# Altium PCB PCB1.PcbDoc
Units mil, origin at the board's own origin, x right, y up, seen from the top; angles counter-clockwise.
Board outline 2810 x 3790 mil, 2 copper layers (Top Layer, Bottom Layer); 3 components, 148 nets, 236 pads, 0 vias.
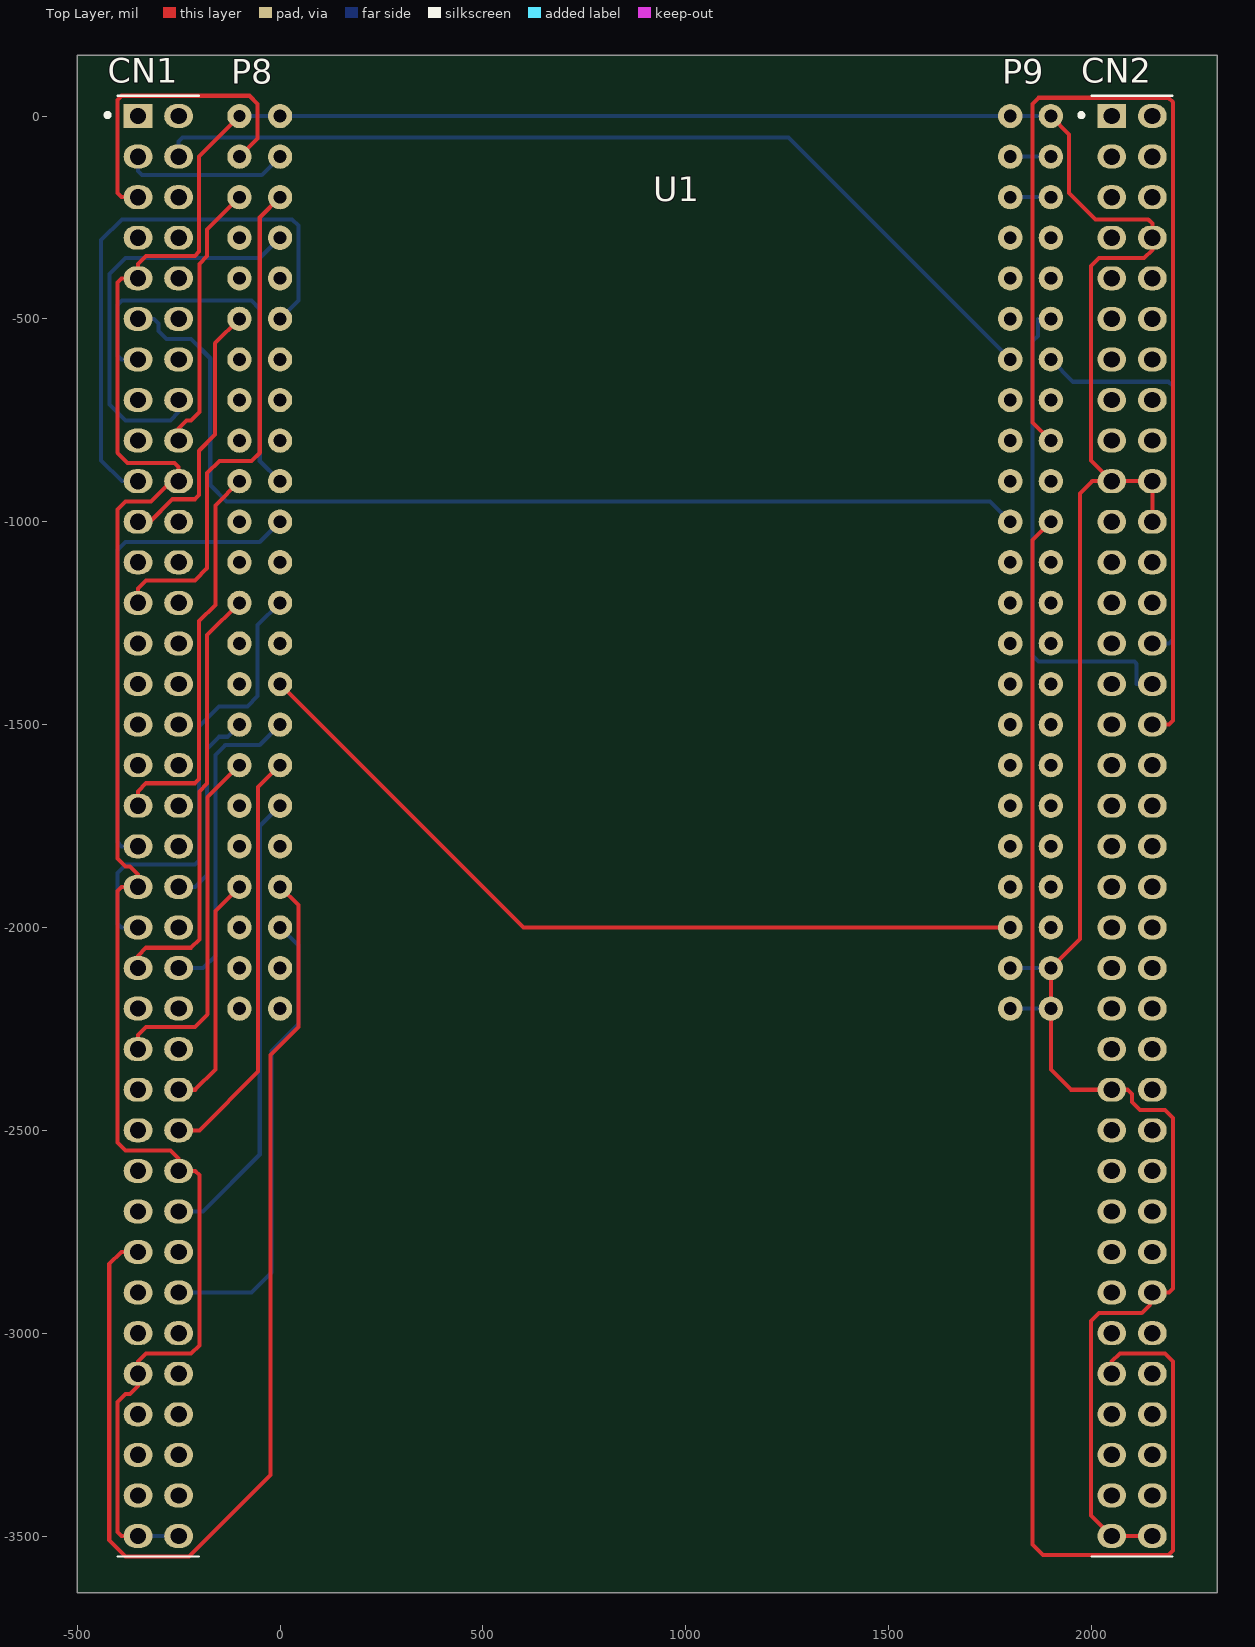
[diagram p0: Top Layer view]
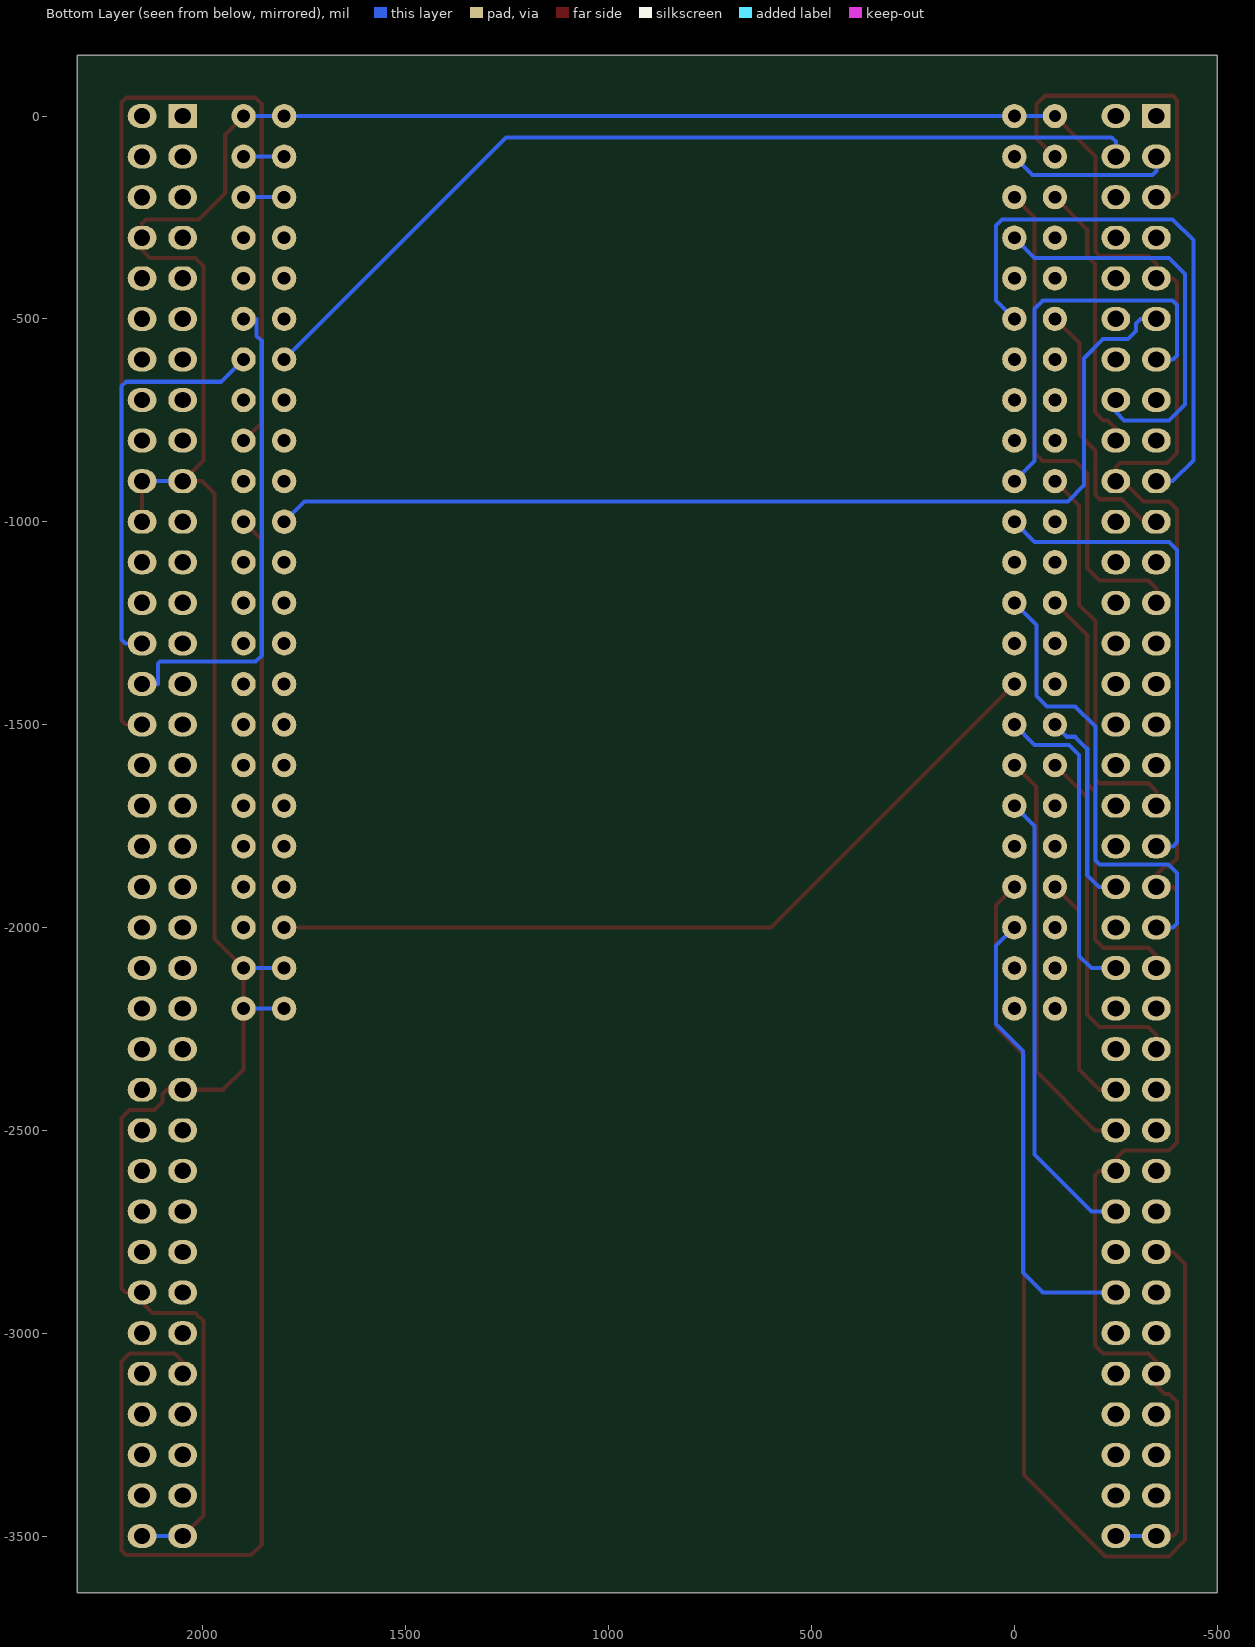
[diagram p1: Bottom Layer view, seen from below]

## Layer stack, top to bottom
Top Solder: solder mask 0.4, Solder Resist, Dk 3.5
Top Layer: signal copper 1.4
Dielectric 1: dielectric 12.6, FR-4, Dk 4.8
Bottom Layer: signal copper 1.4
Bottom Solder: solder mask 0.4, Solder Resist, Dk 3.5

## Board outline
-500,-3640 2310,-3640 2310,150 -500,150

## Design rules (kind name [scope] priority, off if disabled: settings)
Clearance [All] p1: gap=10 ignorepadtopadclearanceinfootprint=FALSE except(0: Arc-Hole Track-Hole SMDPad-Hole THPad-Hole Via-Hole Fill-Hole Poly-Hole Region-Hole Text-Hole)
PolygonConnect [All] p1: connectstyle=Relief reliefconductorwidth=10 reliefentries=4 polygonreliefangle="90 Angle" airgapwidth=10
RoutingVias [All] p1: holewidth=28 width=50 viastyle="Through Hole" minholewidth=28 minwidth=50 maxholewidth=28 maxwidth=50
SolderMaskExpansion [All] p1: expansion=4
Width [All] p1: maxlimit=10 minlimit=10 preferedwidth=10
30 further rules are at their usual default settings.

## Components (designator, comment, footprint, x,y, rotation, side; value= is the part's Value field where it differs from the comment)
CN1 "Header 36X2" HDR_2x36_2R54_V_M -350,0 r270 top
CN2 "Header 36X2" HDR_2x36_2R54_V_M 2050,0 r270 top
U1 "BBB Header x 2" "Beaglebone Black Thru" 900,-1100 r0 top

## Footprints (in the part's own frame and the unit in brackets; to place one, negate y for a bottom-side part, rotate by r counter-clockwise, add the part's x,y. Pads: shape width x height; smd on the part's side, far side on the other; paste and mask are expansions set on the pad)
"Beaglebone Black Thru" [mil]
  round 60 hole 31.5: 8-1(-900,1100) 8-3(-900,1000) 8-4(-1000,1000) 8-5(-900,900) 8-6(-1000,900) 8-7(-900,800) 8-8(-1000,800) 8-9(-900,700) 8-10(-1000,700) 8-11(-900,600) 8-12(-1000,600) 8-13(-900,500) 8-14(-1000,500) 8-15(-900,400) 8-16(-1000,400) 8-17(-900,300) 8-18(-1000,300) 8-19(-900,200) 8-20(-1000,200) 8-21(-900,100) 8-22(-1000,100) 8-23(-900,0) 8-24(-1000,0) 8-25(-900,-100) 8-26(-1000,-100) 8-27(-900,-200) 8-28(-1000,-200) 8-29(-900,-300) 8-30(-1000,-300) 8-31(-900,-400) 8-32(-1000,-400) 8-33(-900,-500) 8-34(-1000,-500) 8-35(-900,-600) 8-36(-1000,-600) 8-37(-900,-700) 8-38(-1000,-700) 8-39(-900,-800) 8-40(-1000,-800) 8-41(-900,-900) 8-42(-1000,-900) 8-43(-900,-1000) 8-44(-1000,-1000) 8-45(-900,-1100) 8-46(-1000,-1100) 9-1(1000,1100) 9-2(900,1100) 9-3(1000,1000) 9-4(900,1000) 9-5(1000,900) 9-6(900,900) 9-7(1000,800) 9-8(900,800) 9-9(1000,700) 9-10(900,700) 9-11(1000,600) 9-12(900,600) 9-13(1000,500) 9-14(900,500) 9-15(1000,400) 9-16(900,400) 9-17(1000,300) 9-18(900,300) 9-19(1000,200) 9-20(900,200) 9-21(1000,100) 9-22(900,100) 9-23(1000,0) 9-24(900,0) 9-25(1000,-100) 9-26(900,-100) 9-27(1000,-200) 9-28(900,-200) 9-29(1000,-300) 9-30(900,-300) 9-31(1000,-400) 9-32(900,-400) 9-33(1000,-500) 9-34(900,-500) 9-35(1000,-600) 9-36(900,-600) 9-37(1000,-700) 9-38(900,-700) 9-39(1000,-800) 9-40(900,-800) 9-41(1000,-900) 9-42(900,-900) 9-43(1000,-1000) 9-44(900,-1000) 9-45(1000,-1100) 9-46(900,-1100)
  round 60 hole 30 paste+0: 8-2(-1000,1100)
  body extent -1048,-1163 1048,1160, height 315
HDR_2x36_2R54_V_M [mm] "Male Header, Pitch 2.54mm, 36x2 Position, Mated Height 6mm, Tail Length 3mm"
  rect 1.5x1.8 hole 1.02: 1(0,0)
  oval 1.5x1.8 hole 1.02: 2(0,2.54) 3(2.54,0) 4(2.54,2.54) 5(5.08,0) 6(5.08,2.54) 7(7.62,0) 8(7.62,2.54) 9(10.16,0) 10(10.16,2.54) 11(12.7,0) 12(12.7,2.54) 13(15.24,0) 14(15.24,2.54) 15(17.78,0) 16(17.78,2.54) 17(20.32,0) 18(20.32,2.54) 19(22.86,0) 20(22.86,2.54) 21(25.4,0) 22(25.4,2.54) 23(27.94,0) 24(27.94,2.54) 25(30.48,0) 26(30.48,2.54) 27(33.02,0) 28(33.02,2.54) 29(35.56,0) 30(35.56,2.54) 31(38.1,0) 32(38.1,2.54) 33(40.64,0) 34(40.64,2.54) 35(43.18,0) 36(43.18,2.54) 37(45.72,0) 38(45.72,2.54) 39(48.26,0) 40(48.26,2.54) 41(50.8,0) 42(50.8,2.54) 43(53.34,0) 44(53.34,2.54) 45(55.88,0) 46(55.88,2.54) 47(58.42,0) 48(58.42,2.54) 49(60.96,0) 50(60.96,2.54) 51(63.5,0) 52(63.5,2.54) 53(66.04,0) 54(66.04,2.54) 55(68.58,0) 56(68.58,2.54) 57(71.12,0) 58(71.12,2.54) 59(73.66,0) 60(73.66,2.54) 61(76.2,0) 62(76.2,2.54) 63(78.74,0) 64(78.74,2.54) 65(81.28,0) 66(81.28,2.54) 67(83.82,0) 68(83.82,2.54) 69(86.36,0) 70(86.36,2.54) 71(88.9,0) 72(88.9,2.54)
  silkscreen extent -1.27,-2.03 90.17,3.81, body extent -1.27,-1.27 90.17,3.81, height 9

## Part data
CN1 CN2: "Header, 36-Pin, Dual row", Publisher="Altium Limited", Revision="17-Jul-2002: Re-released for DXP Platform."
U1: library part Beaglebone_Black, "Beaglebone Black Header", Current Rating="5.7A per Contact", Insulation Color=Black, Manufacturer="Samtec Inc.", Manufacturer Part Number=SSW-123-03-G-D, Material Flammability Rating="UL94 V-0", Operating Temperature="-55°C ~ 125°C", Supplier Part Number 1=SSW-123-03-G-D-ND, Voltage Rating=-, Applications=-, Category="Connectors, Interconnects", Connector Type=Receptacle, Contact Finish - Mating=Gold, Contact Finish - Post=Gold, Contact Finish Thickness - Mating="20.0µin (0.51µm)", Contact Finish Thickness - Post="3.00µin (0.076µm)", Contact Length - Post="0.394\" (10.00mm)", Contact Material="Phosphor Bronze", Contact Shape=Square, Contact Type=Forked, Fastening Type=Push-Pull, Features=-, Ingress Protection=-, Insulation Height="0.335\" (8.51mm)", Insulation Material="Liquid Crystal Polymer (LCP)", Mated Stacking Heights=-, Mounting Type="Through Hole", Number of Positions=46, Number of Positions Loaded=All, Packaging=Bulk, Part Status=Active, Pitch - Mating="0.100\" (2.54mm)", Pricing 1="1=6.51 (USD)", RoHS="RoHS Compliant", Row Spacing - Mating="0.100\" (2.54mm)", Stock 1=0, Style="Board to Board or Cable", Supplier 1=Digi-Key, Termination=Solder

## Nets (pads, with @x,y where several pads share a name; then routed paths per layer and width w, separated by ;. In a path a pad name is that pad's centre, name@x,y a point inside that pad or via, vN(x,y) a via of type N, cw(c..) or ccw(c..) an arc to the next point about the centre after c; other vN are vias at no path point)
+3.3: U1.9-15
"+3.3 BBB": U1.9-3 U1.9-4 | length 100
  Bottom Layer w10: U1.9-4 U1.9-3
+3V3: CN2.16
"+5 BBB": U1.9-5 U1.9-6 | length 100
  Bottom Layer w10: U1.9-6 U1.9-5
+5V: CN2.18
AGND: CN1.32
AVDD: CN1.7
E5V: CN2.6
GND: CN1.9 CN1.20 CN1.39 CN1.54 CN1.63 CN1.71 CN1.72 CN2.8 CN2.19 CN2.20 CN2.22 CN2.49 CN2.60 CN2.71 CN2.72 U1.8-1 U1.8-2 U1.9-1 U1.9-2 U1.9-43 U1.9-44 U1.9-45 U1.9-46 | length 11559.5
  Top Layer w10: CN1.71 -391,-3500 -401,-3490 -401,-3170 -381,-3150 -370,-3150 -350,-3130 CN1.63 -350,-3070 -330,-3050 -219,-3050 -199,-3030 -199,-2610 -209,-2600 CN1.54 -250,-2570 -270,-2550 -381,-2550 -401,-2530 -401,-1910 -391,-1900 CN1.39 -350,-1870 -370,-1850 -381,-1850 -401,-1830 -401,-970 -381,-950 -317.95,-950 -267.95,-900 CN1.20 -250,-865 -260,-855 -376,-855 -401,-830 -401,-410 -391,-400 CN1.9 -350,-364.53 -330,-344.53 -210,-344.53 -199.57,-334.09 -199.57,-99.57 U1.8-2 ; U1.9-1 1945,-45 1945,-190 2010,-255 2140,-255 2150,-265 CN2.8 2150,-330 2130,-350 2019,-350 1999,-370 1999,-849 CN2.19 ; CN2.72 CN2.71 1999,-3449 1999,-2970 2019,-2950 2124,-2950 2144,-2930 2144,-2900 CN2.60 2191,-2900 2201,-2890 2201,-2470 2181,-2450 2120,-2450 2100,-2430 2100,-2411 2089,-2400 CN2.49 1950,-2400 1900,-2350 U1.9-45 U1.9-43 1972,-2028 1972,-930 2002,-900 CN2.19 ; CN2.22 CN2.20 CN2.19
  Bottom Layer w10: CN1.71 CN1.72 ; U1.8-2 U1.8-1 U1.9-2 U1.9-1 ; U1.9-46 U1.9-45 ; U1.9-44 U1.9-43 ; CN2.71 CN2.72 ; CN2.19 CN2.20
Heartbeat: U1.8-29 U1.9-42 | length 2048.5
  Top Layer w10: U1.8-29 600,-2000 U1.9-42
IOREF: CN2.12
NetCN1_1: CN1.1
NetCN1_2: CN1.2
NetCN1_10: CN1.10
NetCN2_25: CN2.25
NetCN2_27: CN2.27
NetCN2_29: CN2.29
NetCN2_31: CN2.31
NetCN2_69: CN2.69
NetU1_8-8: U1.8-8
NetU1_8-13: U1.8-13
NetU1_8-14: U1.8-14
NetU1_8-15: U1.8-15
NetU1_8-16: U1.8-16
NetU1_8-17: U1.8-17
NetU1_8-18: U1.8-18
NetU1_8-22: U1.8-22
NetU1_8-36: U1.8-36
NetU1_8-37: U1.8-37
NetU1_8-38: U1.8-38
NetU1_8-42: U1.8-42
NetU1_8-43: U1.8-43
NetU1_8-44: U1.8-44
NetU1_9-9: U1.9-9
NRST: CN2.14
PA0: CN2.28 U1.9-13 | length 1007.5
  Bottom Layer w10: U1.9-13 1955,-655 2190,-655 2201,-666 2201,-1290 2191,-1300 CN2.28
PA1: CN2.30 U1.9-11 | length 1220.7
  Bottom Layer w10: U1.9-11 1868,-500 1868,-542 1855,-555 1855,-1330 1870,-1345 2106,-1345 2111,-1350 2111,-1400 CN2.30
PA2: CN1.35 U1.8-20 | length 973.8
  Top Layer w10: CN1.35 -350,-1664.53 -330,-1644.53 -210,-1644.53 -199.57,-1634.09 -199.57,-1245 -159.57,-1205 -159.57,-959.57 U1.8-20
PA3: CN1.37 U1.8-21 | length 1205.1
  Bottom Layer w10: CN1.37 -391,-1800 -401,-1790 -401,-1070 -381,-1050 -50,-1050 U1.8-21
PA4: CN2.32 U1.9-17 | length 2784.6
  Top Layer w10: U1.9-17 1855,-755 1855,30 1870,45 2190,45 2201,34 2201,-1490 2191,-1500 CN2.32
PA5: CN1.11 U1.9-22 | length 2551.6
  Bottom Layer w10: CN1.11 -311,-500 -300,-511 -300,-530 -280,-550 -219,-550 -172,-597 -172,-910 -132,-950 1750,-950 U1.9-22
PA6: CN1.13 U1.8-19 | length 987.9
  Bottom Layer w10: CN1.13 -390.43,-600 -400.43,-590 -400.43,-465.43 -390,-455 -70,-455 -50,-475 -50,-850 U1.8-19
PA7: CN1.15
PA8: CN1.23
PA9: CN1.21 U1.8-12 | length 653.1
  Top Layer w10: CN1.21 -320,-1000 -264.53,-944.53 -210,-944.53 -199.57,-934.09 -199.57,-825 -160,-785.43 -160,-560 U1.8-12
PA10: CN1.33
PA11: CN1.14
PA12: CN1.12
PA13: CN2.13
PA15: CN2.17
PB0: CN2.34
PB1: CN1.24
PB2: CN1.22
PB3: CN1.31
PB4: CN1.27
PB5: CN1.29
PB6: CN1.17
PB7: CN2.21
PB8: CN1.3 U1.8-3 | length 407.8
  Bottom Layer w10: CN1.3 -350,-135 -340,-145 -45,-145 U1.8-3
PB9: CN1.5 U1.8-4 | length 792.2
  Top Layer w10: CN1.5 -391,-200 -401,-190 -401,40 -391,50 -75,50 -55,30 -55,-55 U1.8-4
PB10: CN1.25 U1.8-5 | length 1261.9
  Top Layer w10: CN1.25 -350,-1165 -330,-1145 -210,-1145 -179.57,-1114.57 -179.57,-880 -149.57,-850 -70,-850 -50,-830 -50,-250 U1.8-5
PB11: CN1.18 U1.8-6 | length 668.6
  Top Layer w10: CN1.18 -250,-770 -230,-750 -219,-750 -199,-730 -199,-364.53 -179.57,-345.09 -179.57,-279.57 U1.8-6
PB12: CN1.16 U1.8-7 | length 1003.7
  Bottom Layer w10: CN1.16 -250,-730 -270,-750 -381,-750 -420.43,-710.57 -420.43,-389.43 -381,-350 -50,-350 U1.8-7
PB13: CN1.30
PB14: CN1.28
PB15: CN1.26
PC0: CN2.38
PC1: CN2.36
PC2: CN2.35
PC3: CN2.37
PC4: CN1.34
PC5: CN1.6
PC6: CN1.4 U1.9-14 | length 2317.7
  Bottom Layer w10: CN1.4 -250,-63 -240,-53 1253,-53 U1.9-14
PC7: CN1.19 U1.8-11 | length 1417.1
  Bottom Layer w10: CN1.19 -390,-900 -441,-849 -441,-306 -390,-255 30,-255 45,-270 45,-455 U1.8-11
PC10: CN2.1
PC11: CN2.2
PC12: CN2.3
PD0: CN2.57
PD1: CN2.55
PD2: CN2.4
PD3: CN2.40
PD4: CN2.39
PD5: CN2.41
PD6: CN2.43
PD7: CN2.45
PD10: CN1.65
PD11: CN1.45
PD12: CN1.43 U1.8-26 | length 1068.6
  Top Layer w10: CN1.43 -350,-2070 -330,-2050 -219,-2050 -199,-2030 -199,-1664.53 -179.57,-1645.09 -179.57,-1279.57 U1.8-26
PD13: CN1.41 U1.8-25 | length 1151.8
  Bottom Layer w10: CN1.41 -391,-2000 -401,-1990 -401,-1866 -380,-1845 -210,-1845 -199.57,-1834.57 -199.57,-1504.57 -150,-1455 -80,-1455 -55,-1430 -55,-1255 U1.8-25
PD14: CN1.46
PD15: CN1.48
PE0: CN1.64
PE1: CN2.61
PE2: CN2.46
PE3: CN2.47
PE4: CN2.48
PE5: CN2.50
PE6: CN2.62
PE7: CN1.44 U1.8-31 | length 788.7
  Bottom Layer w10: CN1.44 -189.57,-2100 -159.57,-2070 -159.57,-1574.57 -135,-1550 -50,-1550 U1.8-31
PE8: CN1.40 U1.8-32 | length 497.9
  Bottom Layer w10: CN1.40 -209,-1900 -179.57,-1870.57 -179.57,-1559.57 -150,-1530 -130,-1530 U1.8-32
PE9: CN1.52 U1.8-33 | length 1033.4
  Top Layer w10: CN1.52 -199,-2500 -54,-2355 -54,-1654 U1.8-33
PE10: CN1.47 U1.8-34 | length 873.8
  Top Layer w10: CN1.47 -350,-2265 -330,-2245 -210,-2245 -179,-2214 -179,-1679 U1.8-34
PE11: CN1.56 U1.8-35 | length 1138.6
  Bottom Layer w10: CN1.56 -190.1,-2700 -50,-2559.9 -50,-1750 U1.8-35
PE12: CN1.49
PE13: CN1.55
PE14: CN1.51
PE15: CN1.53
PF0: CN2.53
PF1: CN2.51
PF2: CN2.52
PF3: CN1.58
PF4: CN1.38
PF5: CN1.36
PF6: CN2.9
PF7: CN2.11
PF8: CN2.54
PF9: CN2.56
PF10: CN1.42
PF11: CN1.62
PF12: CN1.59
PF13: CN1.57 U1.8-39 | length 2757.1
  Top Layer w10: CN1.57 -391,-2800 -421,-2830 -421,-3510 -381,-3550 -224,-3550 -24,-3350 -24,-2314 45,-2245 45,-1945 U1.8-39
PF14: CN1.50 U1.8-40 | length 586.1
  Top Layer w10: CN1.50 -209,-2400 -159,-2350 -159,-1959 U1.8-40
PF15: CN1.60 U1.8-41 | length 1146.3
  Bottom Layer w10: CN1.60 -70,-2900 -21,-2851 -21,-2304 45,-2238 45,-2045 U1.8-41
PG0: CN2.59
PG1: CN2.58
PG2: CN2.42
PG3: CN2.44
PG4: CN1.69
PG5: CN1.68
PG6: CN1.70
PG7: CN1.67
PG8: CN1.66
PG9: CN2.63 U1.9-21 | length 3564.5
  Top Layer w10: U1.9-21 1855,-1045 1855,-3521 1881,-3547 2190,-3547 2201,-3536 2201,-3070 2181,-3050 2070,-3050 2050,-3070 CN2.63
PG10: CN2.66
PG11: CN2.70
PG13: CN2.68
PG14: CN1.61
PG15: CN2.64
PH2: CN2.67
SPI0_MOSI: U1.9-18
SPI1_CS0: U1.9-28
SPI1_MISO: U1.9-29
SPI1_MOSI: U1.9-30
SPI1_SCLK: U1.9-31
U5V: CN1.8
VBAT: CN2.33
VDD: CN2.5
VIN: CN2.24
pads on no net: CN2.7 CN2.10 CN2.15 CN2.23 CN2.26 CN2.65 U1.8-9 U1.8-10 U1.8-23 U1.8-24 U1.8-27 U1.8-28 U1.8-30 U1.8-45 U1.8-46 U1.9-7 U1.9-8 U1.9-10 U1.9-12 U1.9-16 U1.9-19 U1.9-20 U1.9-23 U1.9-24 U1.9-25 U1.9-26 U1.9-27 U1.9-32 U1.9-33 U1.9-34 U1.9-35 U1.9-36 U1.9-37 U1.9-38 U1.9-39 U1.9-40 U1.9-41

## Dimensions
-250,0 to 2050,0 on Drill Drawing
0,0 to 1800,0 on Drill Drawing

## Text inside footprints (layer, text, board x,y; h text height)
U1: Top Overlay "P9" at 1780,80 h60; Top Overlay "P8" at -120,80 h60